# Altium PCB proto-rev0.PcbDoc (part 1 of 2)
Units mm, origin at the board's own origin, x right, y up, seen from the top; angles counter-clockwise.
Board outline 70 x 100 mm, 2 copper layers (Top Layer, Bottom Layer); 218 components, 156 nets, 639 pads, 222 vias.
Unrouted connection lines stored in the file: 43.
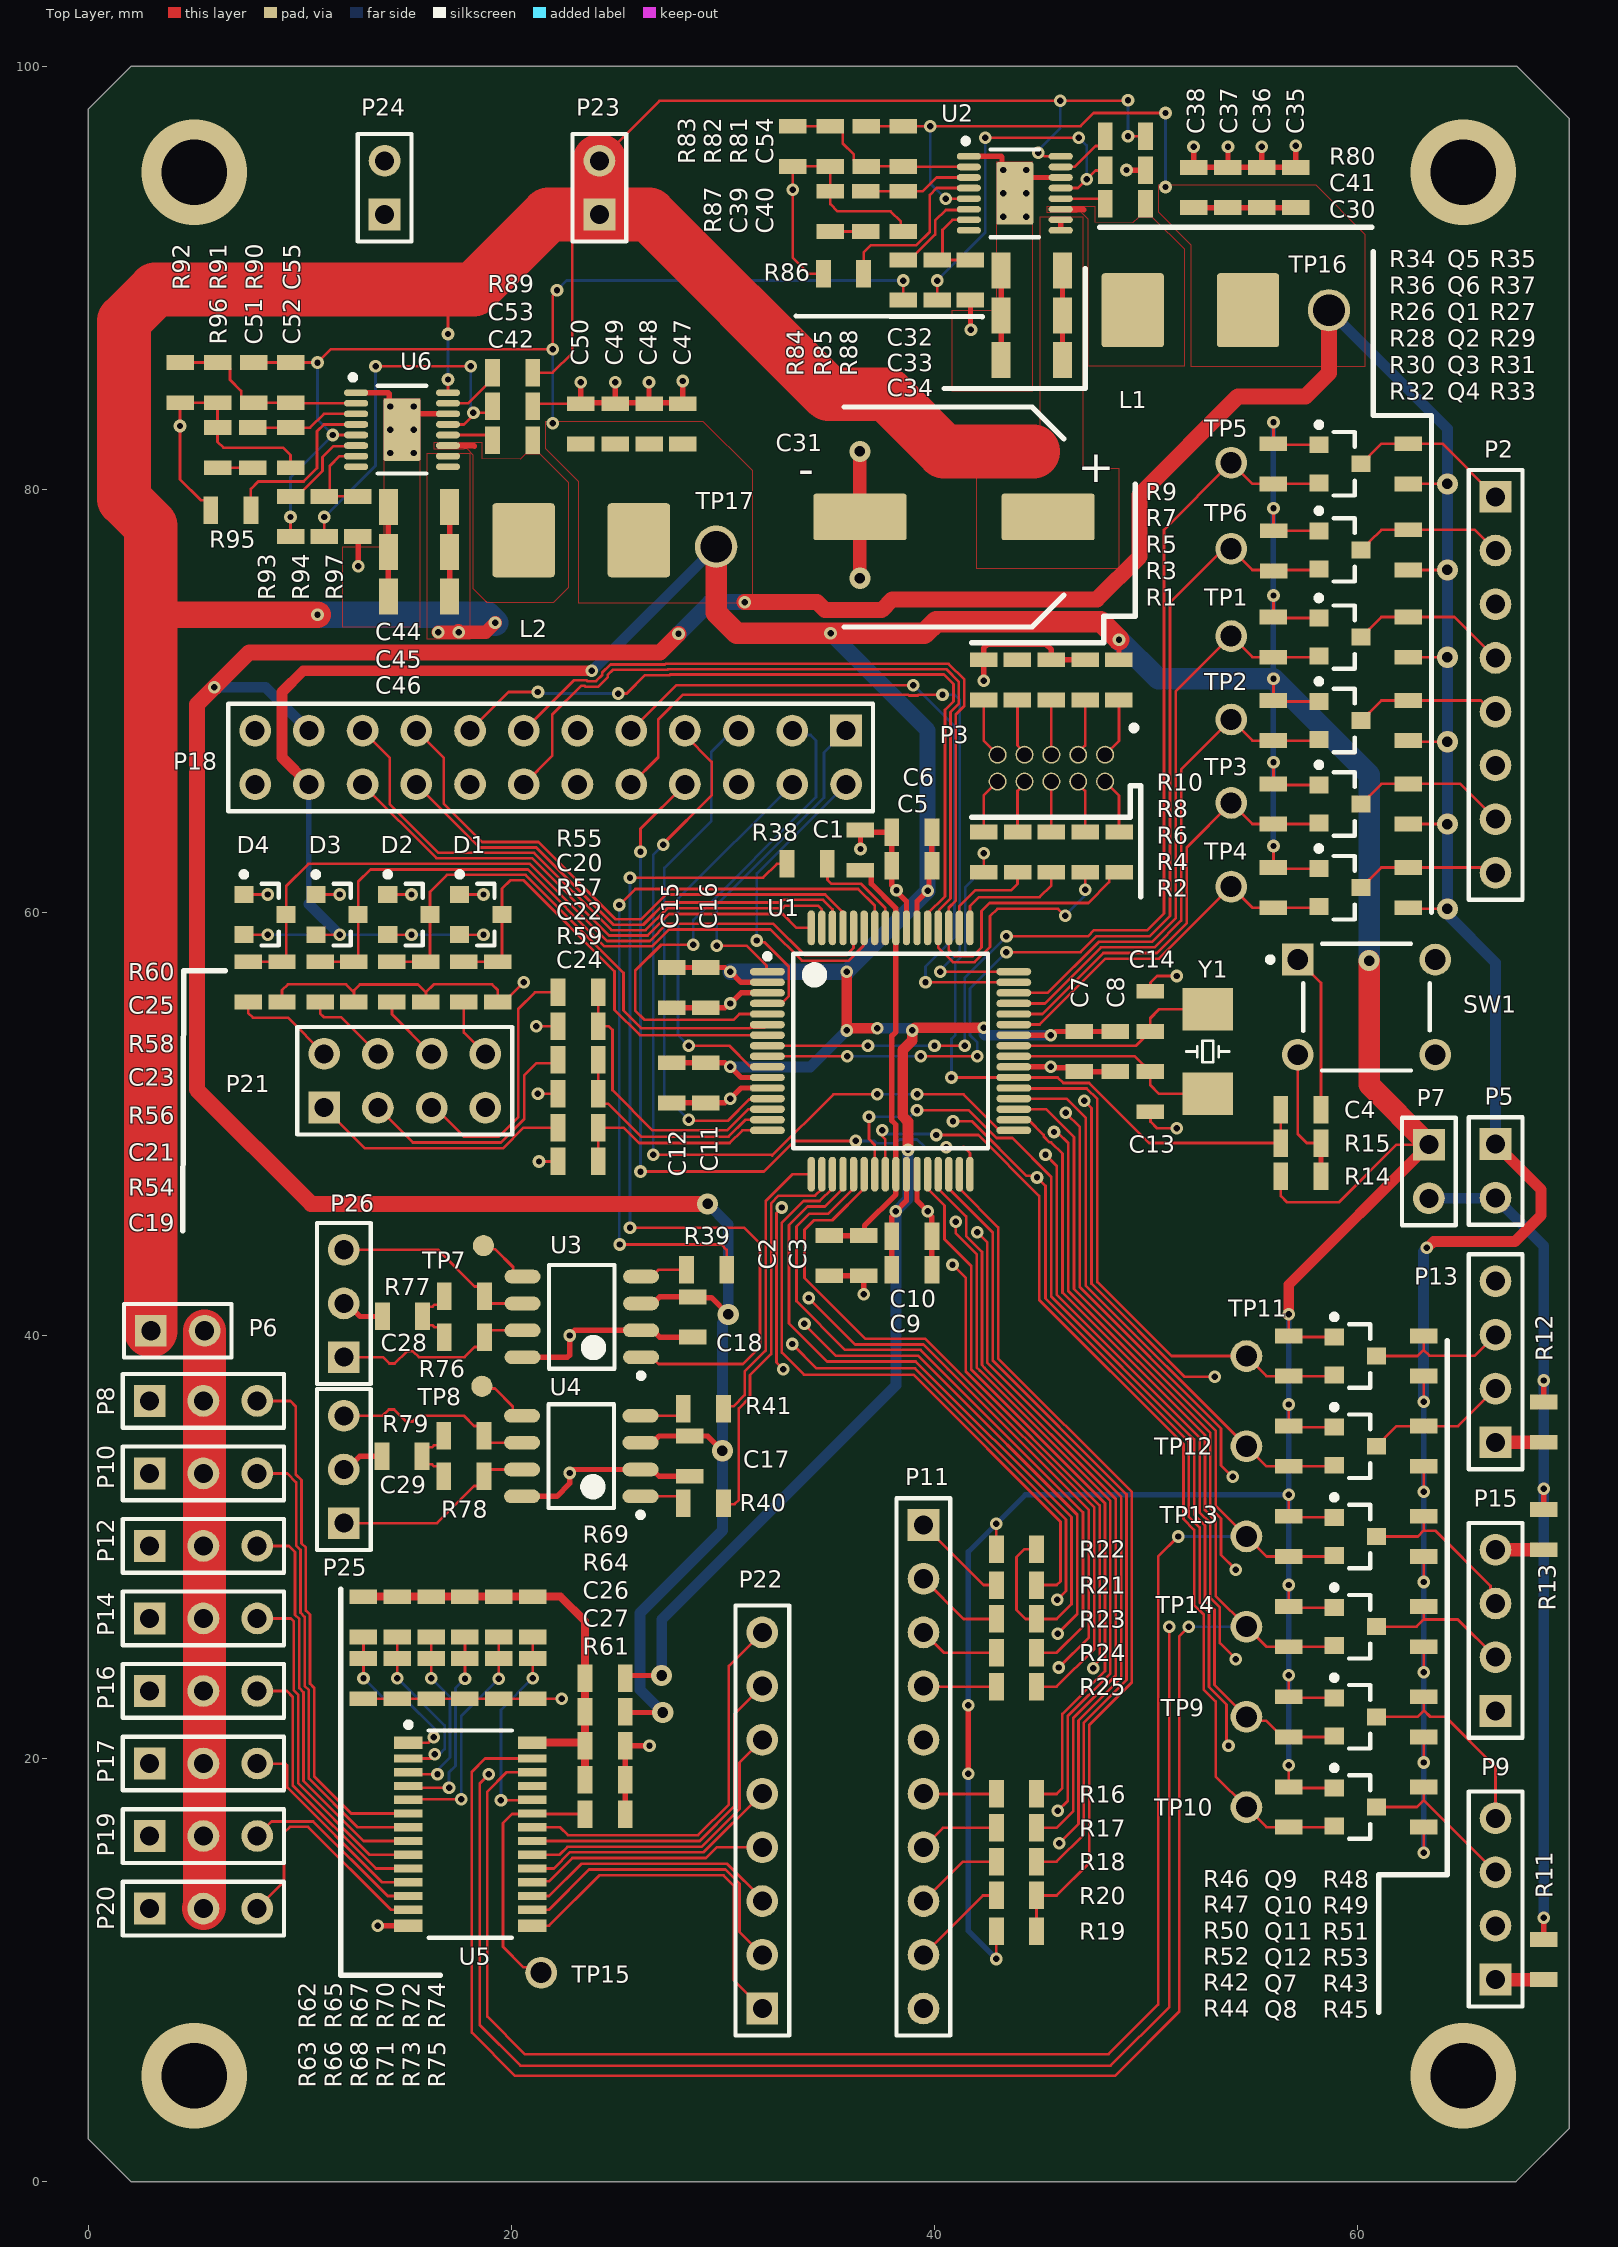
[diagram p0: Top Layer view]
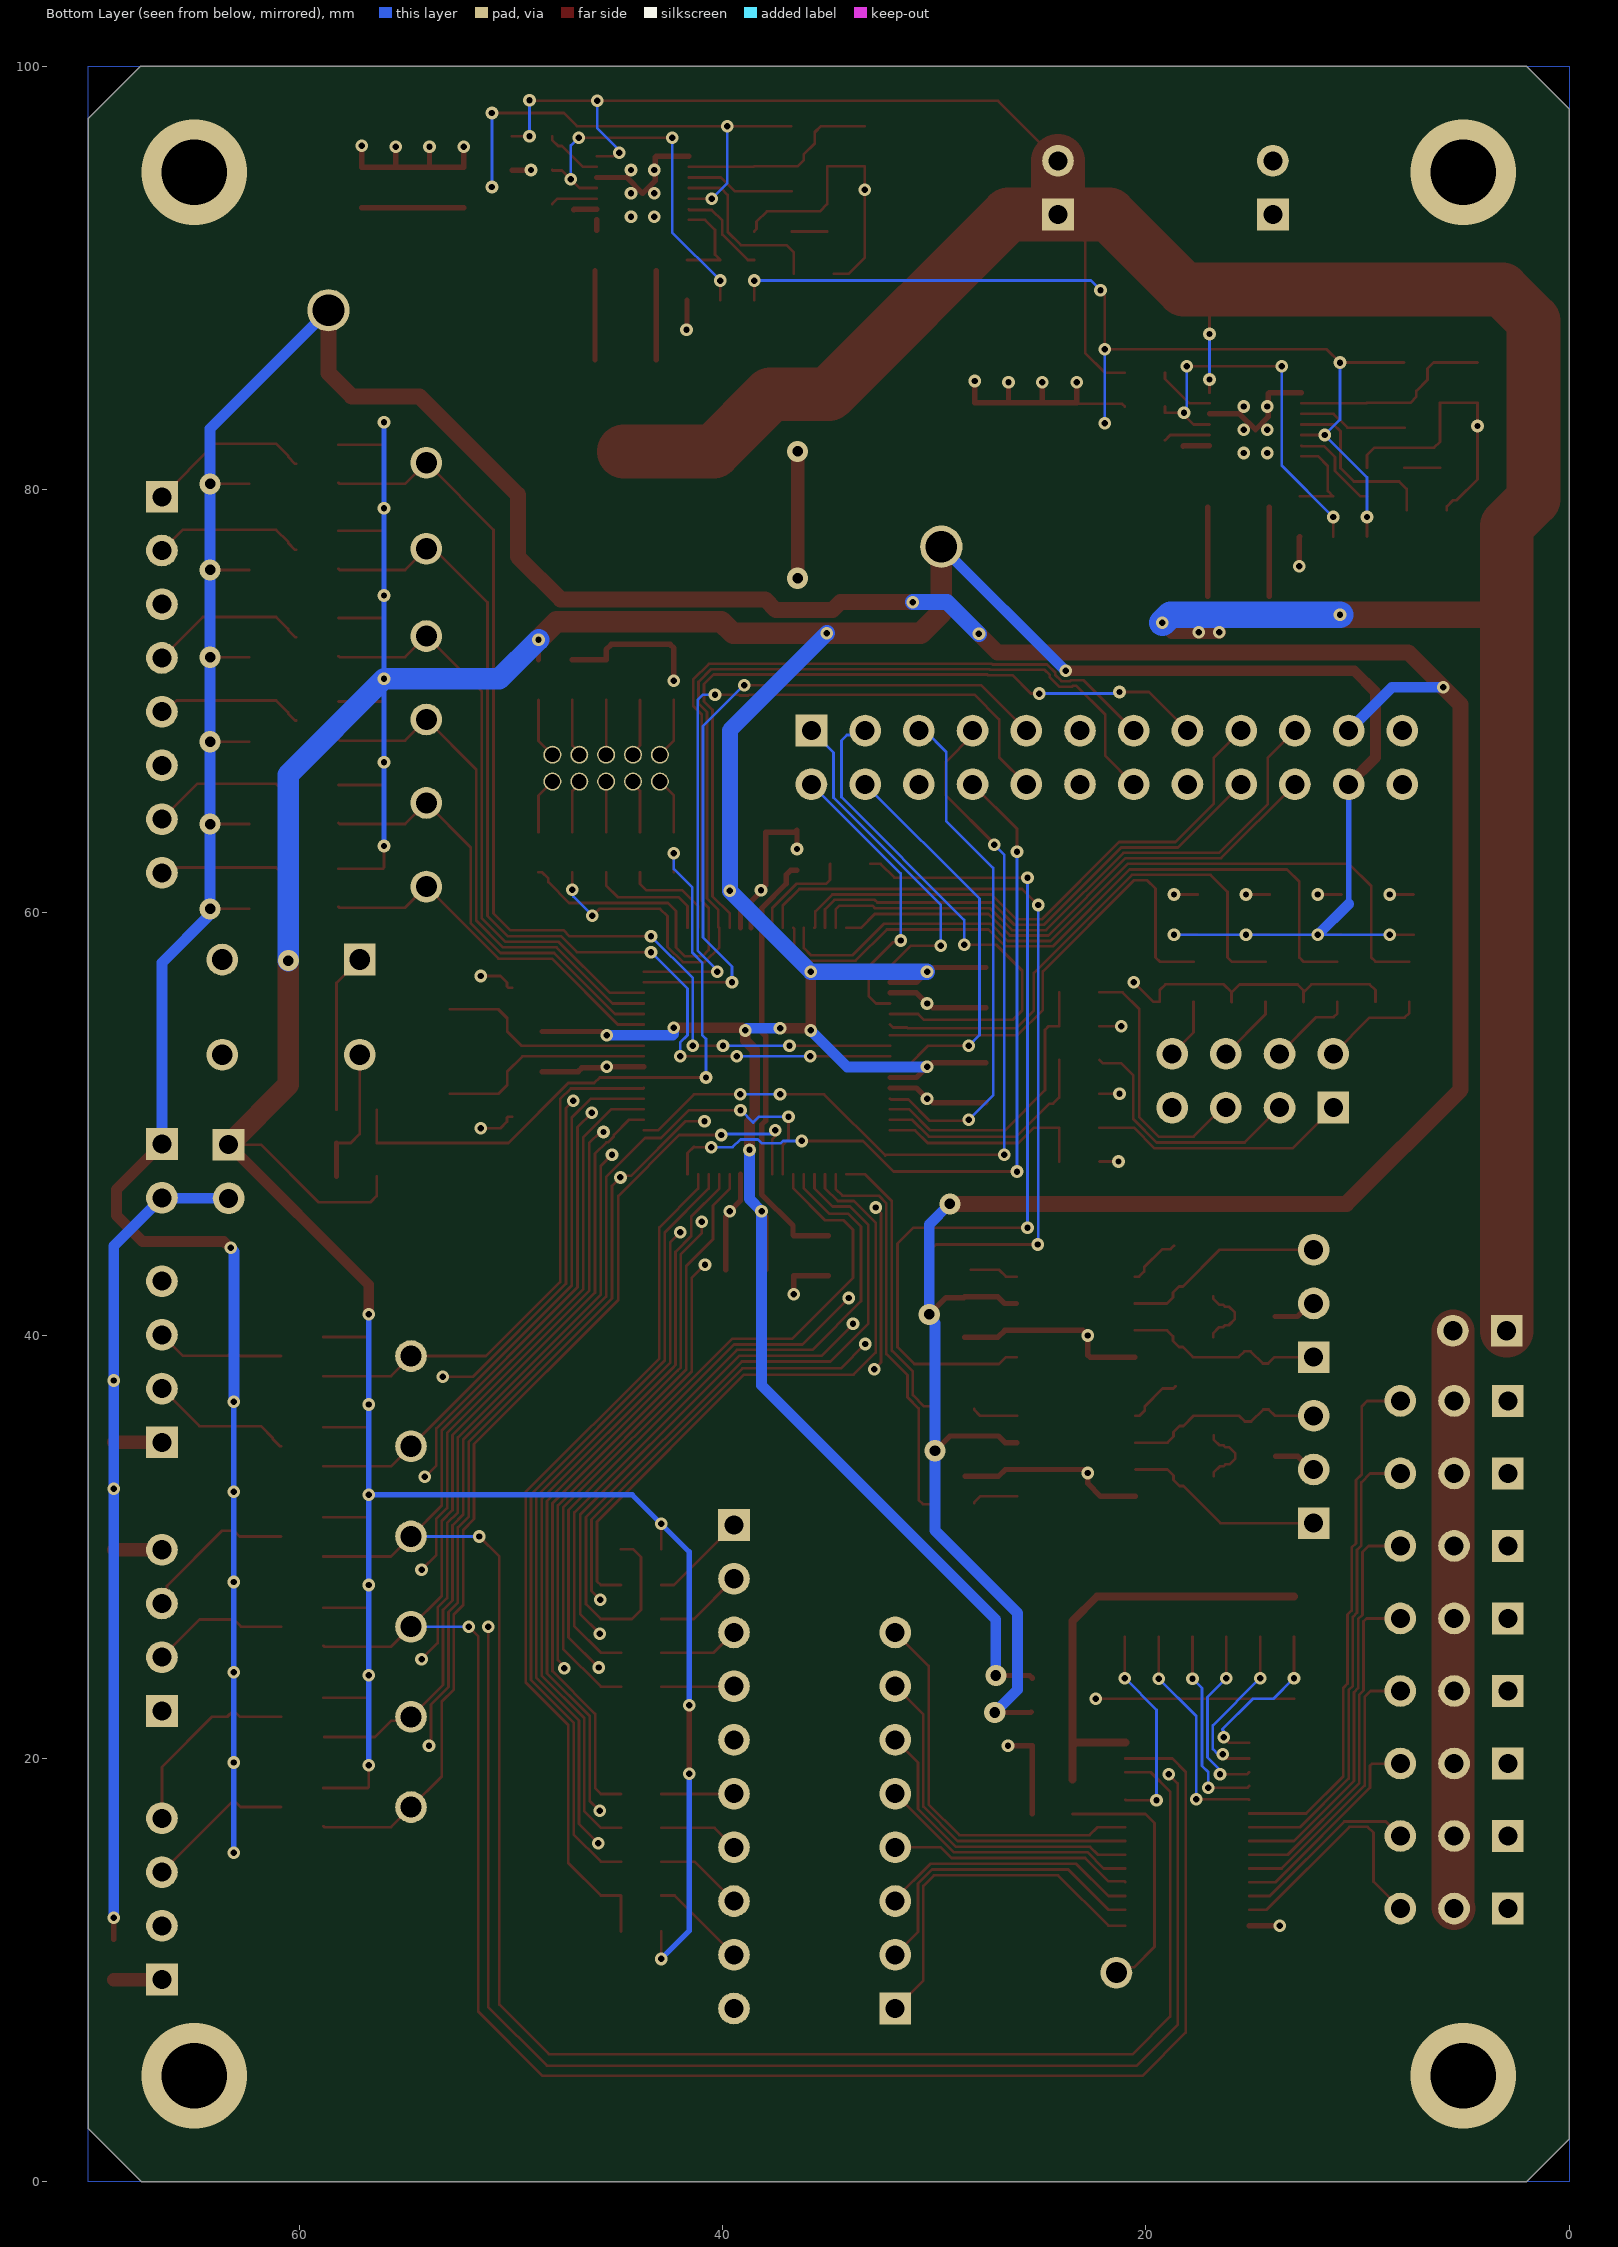
[diagram p1: Bottom Layer view, seen from below]
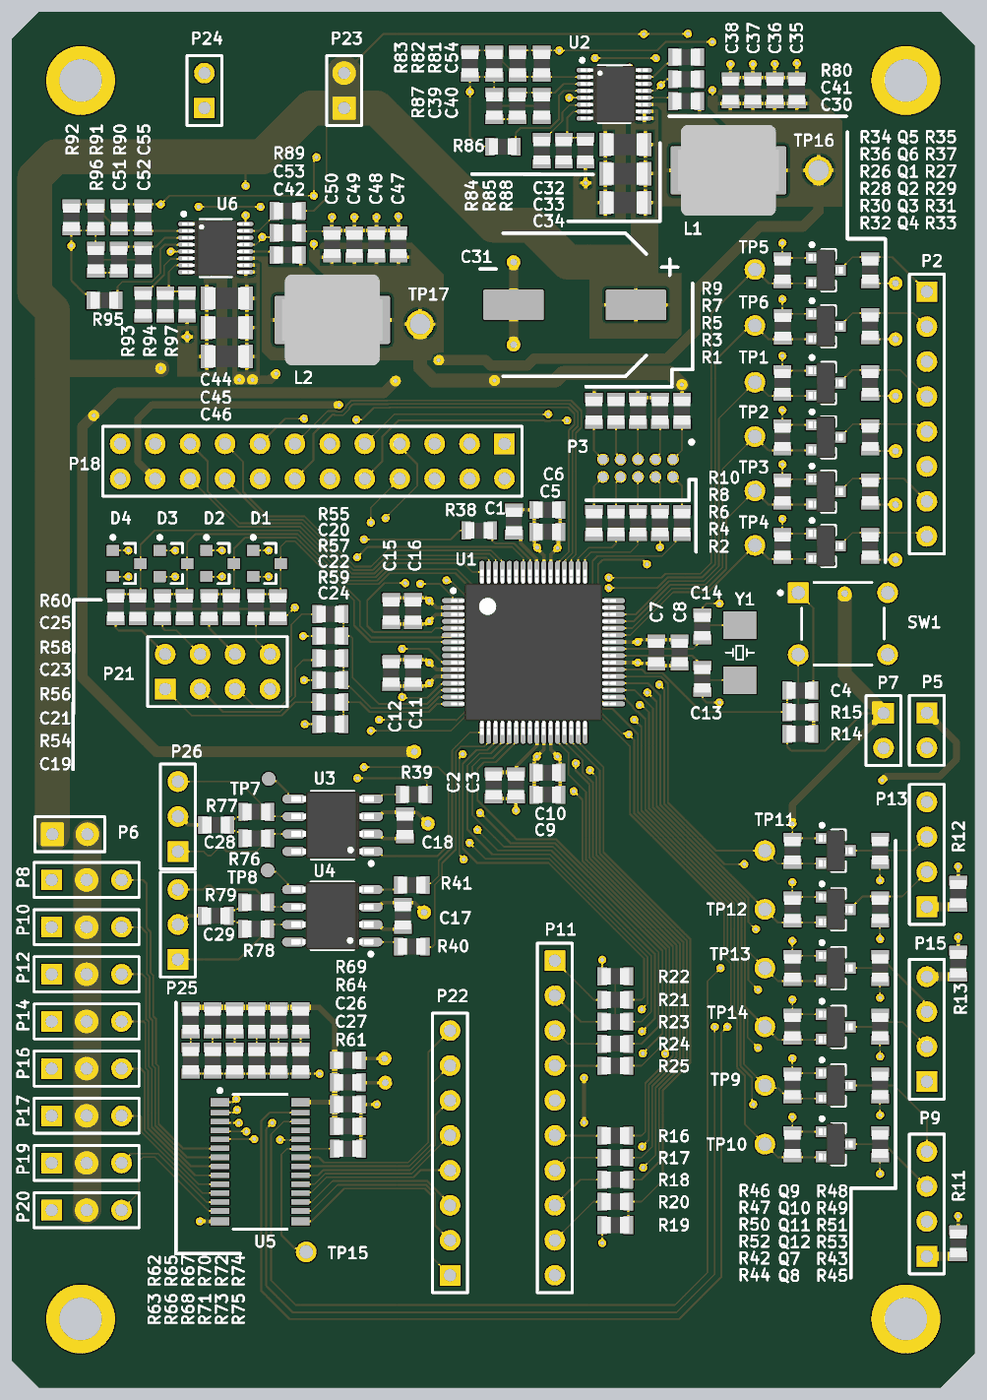
[diagram p3: 3D render of the assembled board from above, using the file's embedded part models]

## Layer stack, top to bottom
Top Solder: solder mask 0.0102, Solder Resist, Dk 3.5
Top Layer: signal copper 0.0356
Dielectric 1: dielectric 0.32, FR-4, Dk 4.8
Bottom Layer: signal copper 0.0356
Bottom Solder: solder mask 0.0102, Solder Resist, Dk 3.5

## Board outline
2,0 67.5,0 70,2.5 70,97.55 67.55,100 2,100 0,98 0,2

## Design rules (kind name [scope] priority, off if disabled: settings)
BoardOutlineClearance [All] p1: gap=0.254 ignorepadtopadclearanceinfootprint=FALSE
Clearance [All] p1: gap=0.127 ignorepadtopadclearanceinfootprint=FALSE
HoleSize [All] p1: absolutevalues=TRUE maxlimit=2.54 minlimit=0.3 maxpercent=80.000 minpercent=20.000
MinimumSolderMaskSliver [All] p1: minsoldermaskwidth=0
PolygonConnect [All] p1: connectstyle=Relief reliefconductorwidth=0.254 reliefentries=4 polygonreliefangle="90 Angle" airgapwidth=0.254
RoutingVias [All] p1: holewidth=0.5 width=1.27 viastyle="Through Hole" minholewidth=0.3 minwidth=0.6 maxholewidth=0.711 maxwidth=1.27
SolderMaskExpansion [All] p1: expansion=0.102
Width [All] p1: maxlimit=2.54 minlimit=0.127 preferedwidth=0.254 minimp=50.000000 maximp=50.000000 favimp=50.000000
28 further rules are at their usual default settings.

## Classes and differential pairs
component class "Secondary Power Supplies": C42 C44 C45 C46 C47 C48 C49 C50 C51 C52 C53 C55 L2 R89 R90 R91 R92 R93 R94 R95 R96 R97 TP17 U6
component class "Primary Power Supplies": C30 C31 C32 C33 C34 C35 C36 C37 C38 C39 C40 C41 C54 L1 R80 R81 R82 R83 R84 R85 R86 R87 R88 TP16 U2
net class PWM[15..0]: PWM0 PWM1 PWM2 PWM3 PWM4 PWM5 PWM6 PWM7 PWM8 PWM9 PWM10 PWM11 PWM12 PWM13 PWM14 PWM15
component class UART-Interface: Q1 Q2 Q3 Q4 Q5 Q6 R26 R27 R28 R29 R30 R31 R32 R33 R34 R35 R36 R37 TP1 TP2 TP3 TP4 TP5 TP6
component class PWM-Generator: C26 C27 R61 R62 R63 R64 R65 R66 R67 R68 R69 R70 R71 R72 R73 R74 R75 TP15 U5
component class "Power and Control": C1 C2 C3 C4 C5 C6 C7 C8 C9 C10 C11 C12 C13 C14 C15 C16 R14 R15 SW1 Y1
component class Pin-Filters: C19 C20 C21 C22 C23 C24 C25 D1 D2 D3 D4 R54 R55 R56 R57 R58 R59 R60
component class Peripherals: R16 R17 R18 R19 R20 R21 R22 R23 R24 R25 U1
component class "Input Power Filter": P23 P24
component class I2C-Interface: Q7 Q8 Q9 Q10 Q11 Q12 R42 R43 R44 R45 R46 R47 R48 R49 R50 R51 R52 R53 TP9 TP10 TP11 TP12 TP13 TP14
component class Connectors: C28 C29 P2 P3 P5 P6 P7 P8 P9 P10 P11 P12 P13 P14 P15 P16 P17 P18 P19 P20 P21 P22 P25 P26 R1 R2 R3 R4 R5 R6 R7 R8 R9 R10 R11 R12 R13 R76 R77 R78 R79
component class CAN-Interface: C17 C18 R38 R39 R40 R41 TP7 TP8 U3 U4

## Components (designator, comment, footprint, x,y, rotation, side; value= is the part's Value field where it differs from the comment)
C1 "C0805C104K8RACTU" FOOTPRINT-0805-GEN#1 35.85,64.25 r270 top value=100nF
C2 "C0805C105K8RACTU" FOOTPRINT-0805-GEN#1 35.675,42.475 r90 top value=1uF
C3 "C0805C225K8RACTU" FOOTPRINT-0805-GEN#1 36,45.075 r270 top value=2.2uF
C4 "C0805C104K8RACTU" FOOTPRINT-0805-GEN#2 58.625,50.025 r180 top value=100nF
C5 "C0805C225K8RACTU" FOOTPRINT-0805-GEN#1 40.225,62.85 r180 top value=2.2uF
C6 "C0805C225K8RACTU" FOOTPRINT-0805-GEN#1 40.225,64.45 r180 top value=2.2uF
C7 "C0805C225K8RACTU" FOOTPRINT-0805-GEN#1 46.2,54.725 r270 top value=2.2uF
C8 "C0805C225K8RACTU" FOOTPRINT-0805-GEN#1 47.9,54.725 r270 top value=2.2uF
C9 "C0805C225K8RACTU" FOOTPRINT-0805-GEN#1 37.625,42.45 r0 top value=2.2uF
C10 "C0805C225K8RACTU" FOOTPRINT-0805-GEN#1 37.625,44.05 r0 top value=2.2uF
C11 "C0805C225K8RACTU" FOOTPRINT-0805-GEN#1 28.525,53.25 r270 top value=2.2uF
C12 "C0805C225K8RACTU" FOOTPRINT-0805-GEN#1 26.925,53.25 r270 top value=2.2uF
C13 "C0805C100K5RAC7800" FOOTPRINT-0805-GEN#1 49.55,52.825 r270 top value=10pF
C14 "C0805C100K5RAC7800" FOOTPRINT-0805-GEN#1 50.85,54.025 r90 top value=10pF
C15 "C0805C104K8RACTU" FOOTPRINT-0805-GEN#1 28.225,55.15 r90 top value=100nF
C16 "C0805C105K8RACTU" FOOTPRINT-0805-GEN#1 29.825,55.15 r90 top value=1uF
C17 "C0805C105K8RACTU" FOOTPRINT-0805-GEN#1 29.075,33 r90 top value=1uF
C18 "C0805C105K8RACTU" FOOTPRINT-0805-GEN#1 29.225,39.575 r90 top value=1uF
C19 "Capacitor-Generic-0805" FOOTPRINT-0805-GEN#1 20,55.425 r90 top value=1nF
C20 "Capacitor-Generic-0805" FOOTPRINT-0805-GEN#1 21.853,53.978 r0 top value=1nF
C21 "Capacitor-Generic-0805" FOOTPRINT-0805-GEN#1 16.6,55.425 r90 top value=1nF
C22 "Capacitor-Generic-0805" FOOTPRINT-0805-GEN#1 21.853,50.778 r0 top value=1nF
C23 "Capacitor-Generic-0805" FOOTPRINT-0805-GEN#1 13.203,55.422 r90 top value=1nF
C24 "Capacitor-Generic-0805" FOOTPRINT-0805-GEN#1 21.853,47.578 r0 top value=1nF
C25 "Capacitor-Generic-0805" FOOTPRINT-0805-GEN#1 9.8,55.425 r90 top value=1nF
C26 "C0805C225K8RACTU" FOOTPRINT-0805-GEN#1 23.125,19.95 r0 top value=2.2uF
C27 "C0805C104K8RACTU" FOOTPRINT-0805-GEN#1 25.725,19.65 r180 top value=100nF
C28 "Capacitor-Generic-0805" FOOTPRINT-0805-GEN#1 16.15,41.55 r180 top value=100pF
C29 "Capacitor-Generic-0805" FOOTPRINT-0805-GEN#1 16.125,34.95 r180 top value=100pF
C30 "Capacitor-Generic-0805" FOOTPRINT-0805-GEN#1 50.325,94.152 r180 top value=0.1uF
C31 "Capacitor-Nippon-HHXC350ARA470MF80G" FOOTPRINT-NIPPON-JA0 40.925,78.7 r0 top value=100uF
C32 "C1206C475K5RACAUTO" FOOTPRINT-1206-GEN 42.7,89.552 r0 top value=4.7uF
C33 "C1206C475K5RACAUTO" FOOTPRINT-1206-GEN 42.7,87.427 r0 top value=4.7uF
C34 "C1206C475K5RACAUTO" FOOTPRINT-1206-GEN 42.7,85.327 r0 top value=4.7uF
C35 "C0805C225K8PAC" FOOTPRINT-0805-GEN#1 57.725,92.977 r90 top value=2.2uF
C36 "C0805C225K8PAC" FOOTPRINT-0805-GEN#1 56.125,92.977 r90 top value=2.2uF
C37 "C0805C106K8PAC" FOOTPRINT-0805-GEN#1 53.225,95.577 r270 top value=10uF
C38 "C0805C106K8PAC" FOOTPRINT-0805-GEN#1 51.6,95.577 r270 top value=10uF
C39 "C0805C100J3HACTU" FOOTPRINT-0805-GEN#1 37.4,91.852 r90 top value=10pF
C40 "C0805C519K5GACTU" FOOTPRINT-0805-GEN#1 39.175,91.852 r90 top value=5.1pF
C41 "C0805C475K8PAC" FOOTPRINT-0805-GEN#1 50.325,95.752 r180 top value=4.7uF
C42 "Capacitor-Generic-0805" FOOTPRINT-0805-GEN#1 21.353,82.974 r180 top value=0.1uF
C44 "C1206C475K5RACAUTO" FOOTPRINT-1206-GEN 13.728,78.374 r0 top value=4.7uF
C45 "C1206C475K5RACAUTO" FOOTPRINT-1206-GEN 13.728,76.249 r0 top value=4.7uF
C46 "C1206C475K5RACAUTO" FOOTPRINT-1206-GEN 13.728,74.149 r0 top value=4.7uF
C47 "C0805C225K8PAC" FOOTPRINT-0805-GEN#1 28.753,81.799 r90 top value=2.2uF
C48 "C0805C225K8PAC" FOOTPRINT-0805-GEN#1 27.153,81.799 r90 top value=2.2uF
C49 "C0805C106K8PAC" FOOTPRINT-0805-GEN#1 24.253,84.399 r270 top value=10uF
C50 "C0805C106K8PAC" FOOTPRINT-0805-GEN#1 22.628,84.399 r270 top value=10uF
C51 "C0805C100J3HACTU" FOOTPRINT-0805-GEN#1 8.428,80.674 r90 top value=10pF
C52 "C0805C519K5GACTU" FOOTPRINT-0805-GEN#1 10.203,80.674 r90 top value=5.1pF
C53 "C0805C475K8PAC" FOOTPRINT-0805-GEN#1 21.353,84.574 r180 top value=4.7uF
C54 "C0805C519K5GACTU" FOOTPRINT-0805-GEN#1 39.175,94.927 r90 top value=5.1pF
C55 "C0805C519K5GACTU" FOOTPRINT-0805-GEN#1 10.203,83.749 r90 top value=5.1pF
D1 "BAT54SLT1G" FOOTPRINT-ONSC-SOT23-1A2KA3K 18.55,59.9 r0 top
D2 "BAT54SLT1G" FOOTPRINT-ONSC-SOT23-1A2KA3K 15.15,59.9 r0 top
D3 "BAT54SLT1G" FOOTPRINT-ONSC-SOT23-1A2KA3K 11.753,59.897 r0 top
D4 "BAT54SLT1G" FOOTPRINT-ONSC-SOT23-1A2KA3K 8.35,59.9 r0 top
L1 "Inductor-Bourns-SRP7050TA-2R2M" FOOTPRINT-BOURNS-SRP7050TA 52.1,88.475 r180 top
L2 "Inductor-Bourns-SRP7050TA-2R2M" FOOTPRINT-BOURNS-SRP7050TA 23.3,77.6 r180 top
P2 "Header 8" HDR1X8 66.525,79.655 r270 top
P3 "IDC 10 pos" FOOTPRINT-GENERIC-10-HEADER-0MM5 45.525,66.825 r270 top
P5 "Header 2" HDR1X2 66.525,49.05 r270 top
P6 "Header 2" HDR1X2 2.95,40.225 r0 top
P7 "Header 2" HDR1X2 63.375,49.025 r270 top
P8 "Header 3" HDR1X3 2.895,36.907 r0 top
P9 "Header 4" HDR1X4 66.525,9.55 r90 top
P10 "Header 3" HDR1X3 2.895,33.479 r0 top
P11 "Header 10" HDR1X10 39.48,31.04 r270 top
P12 "Header 3" HDR1X3 2.895,30.05 r0 top
P13 "Header 4" HDR1X4 66.525,34.95 r90 top
P14 "Header 3" HDR1X3 2.895,26.621 r0 top
P15 "Header 4" HDR1X4 66.525,22.25 r90 top
P16 "Header 3" HDR1X3 2.895,23.193 r0 top
P17 "Header 3" HDR1X3 2.895,19.764 r0 top
P18 "Header 12X2" HDR2X12 35.82,68.6 r180 top
P19 "Header 3" HDR1X3 2.895,16.336 r0 top
P20 "Header 3" HDR1X3 2.895,12.907 r0 top
P21 "Header 4X2" HDR2X4 11.145,50.775 r0 top
P22 "Header 8" HDR1X8 31.86,8.18 r90 top
P23 "Header 2" HDR1X2 24.16,93 r90 top
P24 "Header 2" HDR1X2 14,93 r90 top
P25 "Header 3" HDR1X3 12.075,31.125 r90 top
P26 "Header 3" HDR1X3 12.075,38.975 r90 top
Q1 "BSS138Q-7-F" FOOTPRINT-DINC-SOT23-1G2S3D 59.175,73.02 r0 top
Q2 "BSS138Q-7-F" FOOTPRINT-DINC-SOT23-1G2S3D 59.175,69.075 r0 top
Q3 "BSS138Q-7-F" FOOTPRINT-DINC-SOT23-1G2S3D 59.175,65.13 r0 top
Q4 "BSS138Q-7-F" FOOTPRINT-DINC-SOT23-1G2S3D 59.175,61.175 r0 top
Q5 "BSS138Q-7-F" FOOTPRINT-DINC-SOT23-1G2S3D 59.175,81.215 r0 top
Q6 "BSS138Q-7-F" FOOTPRINT-DINC-SOT23-1G2S3D 59.175,77.145 r0 top
Q7 "BSS138Q-7-F" FOOTPRINT-DINC-SOT23-1G2S3D 59.9,21.97 r0 top
Q8 "BSS138Q-7-F" FOOTPRINT-DINC-SOT23-1G2S3D 59.9,17.705 r0 top
Q9 "BSS138Q-7-F" FOOTPRINT-DINC-SOT23-1G2S3D 59.9,39.03 r0 top
Q10 "BSS138Q-7-F" FOOTPRINT-DINC-SOT23-1G2S3D 59.9,34.765 r0 top
Q11 "BSS138Q-7-F" FOOTPRINT-DINC-SOT23-1G2S3D 59.9,30.5 r0 top
Q12 "BSS138Q-7-F" FOOTPRINT-DINC-SOT23-1G2S3D 59.9,26.235 r0 top
R1 "SMC" FOOTPRINT-0805-GEN#1 48.072,72.3 r270 top value=0
R2 "SMC" FOOTPRINT-0805-GEN#1 48.075,64.15 r270 top value=0
R3 "SMC" FOOTPRINT-0805-GEN#1 46.472,72.3 r270 top value=0
R4 "SMC" FOOTPRINT-0805-GEN#1 46.475,64.15 r270 top value=0
R5 "SMC" FOOTPRINT-0805-GEN#1 44.872,72.3 r270 top value=0
R6 "SMC" FOOTPRINT-0805-GEN#1 44.875,64.15 r270 top value=0
R7 "SMC" FOOTPRINT-0805-GEN#1 43.272,72.3 r270 top value=0
R8 "SMC" FOOTPRINT-0805-GEN#1 43.275,64.15 r270 top value=0
R9 "SMC" FOOTPRINT-0805-GEN#1 41.672,72.3 r270 top value=0
R10 "SMC" FOOTPRINT-0805-GEN#1 41.675,64.15 r270 top value=0
R11 "SMC" FOOTPRINT-0805-GEN#1 68.15,11.8 r270 top value=0
R12 "SMC" FOOTPRINT-0805-GEN#1 68.15,37.2 r270 top value=0
R13 "SMC" FOOTPRINT-0805-GEN#1 68.15,32.12 r270 top value=0
R14 "SMC" FOOTPRINT-0805-GEN#2 58.625,46.875 r180 top value=100k
R15 "SMC" FOOTPRINT-0805-GEN#2 58.625,48.45 r180 top value=3.3k
R16 "SMC" FOOTPRINT-0805-GEN#1 45.175,18.975 r180 top value=33.3
R17 "SMC" FOOTPRINT-0805-GEN#1 45.175,17.375 r180 top value=33.3
R18 "SMC" FOOTPRINT-0805-GEN#1 45.175,15.775 r180 top value=33.3
R19 "SMC" FOOTPRINT-0805-GEN#1 45.175,12.475 r180 top value=10k
R20 "SMC" FOOTPRINT-0805-GEN#1 45.175,14.175 r180 top value=0
R21 "SMC" FOOTPRINT-0805-GEN#1 45.175,28.85 r180 top value=33.3
R22 "SMC" FOOTPRINT-0805-GEN#1 45.175,30.55 r180 top value=10k
R23 "SMC" FOOTPRINT-0805-GEN#1 45.175,27.25 r180 top value=0
R24 "SMC" FOOTPRINT-0805-GEN#1 45.175,25.65 r180 top value=33.3
R25 "SMC" FOOTPRINT-0805-GEN#1 45.175,24.05 r180 top value=33.3
R26 "SMC" FOOTPRINT-0805-GEN#1 56.675,71.72 r90 top value=10k
R27 "SMC" FOOTPRINT-0805-GEN#1 63.05,71.72 r90 top value=10k
R28 "SMC" FOOTPRINT-0805-GEN#1 56.675,67.775 r90 top value=10k
R29 "SMC" FOOTPRINT-0805-GEN#1 63.05,67.775 r90 top value=10k
R30 "SMC" FOOTPRINT-0805-GEN#1 56.675,63.83 r90 top value=10k
R31 "SMC" FOOTPRINT-0805-GEN#1 63.05,63.83 r90 top value=10k
R32 "SMC" FOOTPRINT-0805-GEN#1 56.675,59.875 r90 top value=10k
R33 "SMC" FOOTPRINT-0805-GEN#1 63.05,59.875 r90 top value=10k
R34 "SMC" FOOTPRINT-0805-GEN#1 56.675,79.915 r90 top value=10k
R35 "SMC" FOOTPRINT-0805-GEN#1 63.05,79.915 r90 top value=10k
R36 "SMC" FOOTPRINT-0805-GEN#1 56.7,75.795 r90 top value=10k
R37 "SMC" FOOTPRINT-0805-GEN#1 63.05,75.845 r90 top value=10k
R38 "SMC" FOOTPRINT-0805-GEN#1 35.275,62.95 r180 top value=33.3
R39 "SMC" FOOTPRINT-0805-GEN#1 30.525,43.76 r180 top value=33.3
R40 "SMC" FOOTPRINT-0805-GEN#1 30.375,32.72 r180 top value=33.3
R41 "SMC" FOOTPRINT-0805-GEN#1 30.375,37.18 r180 top value=33.3
R42 "SMC" FOOTPRINT-0805-GEN#1 57.4,20.67 r90 top value=2.2k
R43 "SMC" FOOTPRINT-0805-GEN#1 63.775,20.67 r90 top value=2.2k
R44 "SMC" FOOTPRINT-0805-GEN#1 57.4,16.405 r90 top value=2.2k
R45 "SMC" FOOTPRINT-0805-GEN#1 63.775,16.405 r90 top value=2.2k
R46 "SMC" FOOTPRINT-0805-GEN#1 57.4,37.73 r90 top value=2.2k
R47 "SMC" FOOTPRINT-0805-GEN#1 57.4,33.465 r90 top value=2.2k
R48 "SMC" FOOTPRINT-0805-GEN#1 63.775,37.73 r90 top value=2.2k
R49 "SMC" FOOTPRINT-0805-GEN#1 63.775,33.465 r90 top value=2.2k
R50 "SMC" FOOTPRINT-0805-GEN#1 57.4,29.2 r90 top value=2.2k
R51 "SMC" FOOTPRINT-0805-GEN#1 63.775,29.2 r90 top value=2.2k
R52 "SMC" FOOTPRINT-0805-GEN#1 57.4,24.935 r90 top value=2.2k
R53 "SMC" FOOTPRINT-0805-GEN#1 63.775,24.935 r90 top value=2.2k
R54 "SMC" FOOTPRINT-0805-GEN#1 18.4,55.425 r90 top value=33.3
R55 "SMC" FOOTPRINT-0805-GEN#1 21.853,55.578 r0 top value=33.3
R56 "SMC" FOOTPRINT-0805-GEN#1 15,55.425 r90 top value=33.3
R57 "SMC" FOOTPRINT-0805-GEN#1 21.853,52.378 r0 top value=33.3
R58 "SMC" FOOTPRINT-0805-GEN#1 11.603,55.422 r90 top value=33.3
R59 "SMC" FOOTPRINT-0805-GEN#1 21.853,49.178 r0 top value=33.3
R60 "SMC" FOOTPRINT-0805-GEN#1 8.2,55.425 r90 top value=33.3
R61 "SMC" FOOTPRINT-0805-GEN#1 25.725,18.025 r180 top value=4.7k
R62 "SMC" FOOTPRINT-0805-GEN#2 12.35,25.4 r90 top value=4.7k
R63 "SMC" FOOTPRINT-0805-GEN#2 13.65,25.075 r270 top value=4.7k
R64 "SMC" FOOTPRINT-0805-GEN#1 23.125,21.55 r0 top value=0
R65 "SMC" FOOTPRINT-0805-GEN#2 13.95,25.4 r90 top value=4.7k
R66 "SMC" FOOTPRINT-0805-GEN#2 15.25,25.075 r270 top value=4.7k
R67 "SMC" FOOTPRINT-0805-GEN#2 15.55,25.4 r90 top value=4.7k
R68 "SMC" FOOTPRINT-0805-GEN#2 16.85,25.075 r270 top value=4.7k
R69 "SMC" FOOTPRINT-0805-GEN#1 25.725,24.45 r180 top value=0
R70 "SMC" FOOTPRINT-0805-GEN#2 17.15,25.4 r90 top value=4.7k
R71 "SMC" FOOTPRINT-0805-GEN#2 18.45,25.075 r270 top value=4.7k
R72 "SMC" FOOTPRINT-0805-GEN#2 18.75,25.4 r90 top value=4.7k
R73 "SMC" FOOTPRINT-0805-GEN#2 20.05,25.075 r270 top value=4.7k
R74 "SMC" FOOTPRINT-0805-GEN#1 21.65,25.4 r90 top value=4.7k
R75 "SMC" FOOTPRINT-0805-GEN#1 20.35,25.075 r270 top value=4.7k
R76 "SMC" FOOTPRINT-0805-GEN#1 16.475,39.275 r0 top value=60
R77 "SMC" FOOTPRINT-0805-GEN#1 19.075,42.5 r180 top value=60
R78 "SMC" FOOTPRINT-0805-GEN#1 16.45,32.7 r0 top value=60
R79 "SMC" FOOTPRINT-0805-GEN#1 19.05,35.92 r180 top value=60
R80 "SMC" FOOTPRINT-0805-GEN#1 50.325,97.352 r180 top value=0
R81 "SMC" FOOTPRINT-0805-GEN#2 36.125,94.927 r90 top value=619k
R82 "SMC" FOOTPRINT-0805-GEN#1 34.425,97.527 r270 top value=84.5k
R83 "Trim, 0 ohm" FOOTPRINT-0805-GEN#1 32.65,97.527 r270 top value=DNP
R84 "SMC" FOOTPRINT-0805-GEN#1 37.875,91.202 r270 top value=100k
R85 "SMC" FOOTPRINT-0805-GEN#1 39.475,91.202 r270 top value=100k
R86 "SMC" FOOTPRINT-0805-GEN#1 34.4,89.552 r0 top value=37.4k
R87 "SMC" FOOTPRINT-0805-GEN#1 34.425,94.452 r270 top value=154k
R88 "SMC" FOOTPRINT-0805-GEN#1 42.35,88.602 r90 top value=100k
R89 "SMC" FOOTPRINT-0805-GEN#1 21.353,86.174 r180 top value=0
R90 "SMC" FOOTPRINT-0805-GEN#1 8.453,83.749 r90 top value=619k
R91 "SMC" FOOTPRINT-0805-GEN#1 5.453,86.349 r270 top value=137k
R92 "Trim, 0 ohm" FOOTPRINT-0805-GEN#1 3.678,86.349 r270 top value=DNP
R93 "SMC" FOOTPRINT-0805-GEN#1 8.903,80.024 r270 top value=100k
R94 "SMC" FOOTPRINT-0805-GEN#1 10.503,80.024 r270 top value=100k
R95 "SMC" FOOTPRINT-0805-GEN#1 5.428,78.374 r0 top value=37.4k
R96 "SMC" FOOTPRINT-0805-GEN#1 5.453,83.274 r270 top value=133k
R97 "SMC" FOOTPRINT-0805-GEN#1 13.378,77.424 r90 top value=100k
SW1 "1825910-6" TECO-1825910-6_V 60.425,55.525 r0 top
TP1 "Misc-Generic-TP" FOOTPRINT-GENERIC-TP-VIA-1MM 54.025,73.07 r0 top
TP2 "Misc-Generic-TP" FOOTPRINT-GENERIC-TP-VIA-1MM 54.025,69.125 r90 top
TP3 "Misc-Generic-TP" FOOTPRINT-GENERIC-TP-VIA-1MM 54.025,65.18 r90 top
TP4 "Misc-Generic-TP" FOOTPRINT-GENERIC-TP-VIA-1MM 54.025,61.225 r90 top
TP5 "Misc-Generic-TP" FOOTPRINT-GENERIC-TP-VIA-1MM 54.025,81.265 r90 top
TP6 "Misc-Generic-TP" FOOTPRINT-GENERIC-TP-VIA-1MM 54.025,77.195 r90 top
TP7 "Misc-Generic-TP" FOOTPRINT-GENERIC-TP-SMD-1MM 18.675,44.25 r180 top
TP8 "Misc-Generic-TP" FOOTPRINT-GENERIC-TP-SMD-1MM 18.6,37.6 r180 top
TP9 "Misc-Generic-TP" FOOTPRINT-GENERIC-TP-VIA-1MM 54.75,21.97 r0 top
TP10 "Misc-Generic-TP" FOOTPRINT-GENERIC-TP-VIA-1MM 54.75,17.705 r90 top
TP11 "Misc-Generic-TP" FOOTPRINT-GENERIC-TP-VIA-1MM 54.75,39.03 r90 top
TP12 "Misc-Generic-TP" FOOTPRINT-GENERIC-TP-VIA-1MM 54.75,34.765 r90 top
TP13 "Misc-Generic-TP" FOOTPRINT-GENERIC-TP-VIA-1MM 54.75,30.5 r90 top
TP14 "Misc-Generic-TP" FOOTPRINT-GENERIC-TP-VIA-1MM 54.75,26.235 r90 top
TP15 "Misc-Generic-TP" FOOTPRINT-GENERIC-TP-VIA-1MM 21.4,9.875 r90 top
TP16 "Misc-Generic-TP" FOOTPRINT-GENERIC-TP-VIA-1MM5 58.65,88.475 r90 top
TP17 "Misc-Generic-TP" FOOTPRINT-GENERIC-TP-VIA-1MM5 29.678,77.298 r90 top
U1 "IC-TI-TM4C123FH6PM" FOOTPRINT-TI-TM4C123-64-LQFP 37.925,53.45 r0 top
U2 "IC-LTC-LTC3646-1EMSE#PBF" FOOTPRINT-LTC-LTC3646 43.796,94.002 r0 top
U3 "MCP2551" FOOTPRINT-SOIC-8PIN 23.325,40.88 r180 top
U4 "MCP2551" FOOTPRINT-SOIC-8PIN 23.3,34.3 r180 top
U5 "PCA9685PW/Q900,118" FOOTPRINT-NXP-PCA9685 18.05,16.425 r0 top
U6 "IC-LTC-LTC3646-1EMSE#PBF" FOOTPRINT-LTC-LTC3646 14.824,82.824 r0 top
Y1 "NX5032GA-16.000000MHZ-LN-CD-1" FOOTPRINT-NDK-NX5032GA 52.925,53.425 r90 top

## Footprints (in the part's own frame and the unit in brackets; to place one, negate y for a bottom-side part, rotate by r counter-clockwise, add the part's x,y. Pads: shape width x height; smd on the part's side, far side on the other; paste and mask are expansions set on the pad)
FOOTPRINT-0805-GEN#1 [mm] "1/8 Watt"
  rect 0.7x1.3 smd: 1(0.35,0.65) 2(2.25,0.65)
  body extent 0.3,0.05 2.3,1.25, height 0.71
FOOTPRINT-0805-GEN#2 [mm] "1/8 Watt"
  rect 0.7x1.3 smd: 1(0.35,-0.65) 2(2.25,-0.65)
  body extent 0.3,-1.25 2.3,-0.05, height 0.71
FOOTPRINT-1206-GEN [mm] "1/4 Watt"
  rect 0.9x1.7 smd: 1(0.45,0.8) 2(3.35,0.8)
  body extent 0.3,0 3.5,1.6, height 0.71
FOOTPRINT-BOURNS-SRP7050TA [mm] "FIXED IND SMD"
  rrect10% 2.95x3.5 smd: 1(2.725,0) 2(-2.725,0)
  body extent -3.65,-3.3 3.65,3.3, height 4.9
FOOTPRINT-DINC-SOT23-1G2S3D [mm] "SOT23, 3-Leads, Body 2.90x2.40mm, Pitch 0.90mm, IPC Low Density"
  rect 0.9x0.8 smd: 1(-1,0.9) 2(-1,-0.9) 3(1,0)
  silkscreen extent -1.12,-1.5 0.7,1.97, body extent -1.25,-1.5 1.25,1.5, height 1
FOOTPRINT-GENERIC-10-HEADER-0MM5 [mm]
  round 0.85 hole 0.7: 1(-0.635,2.54) 2(0.635,2.54) 3(-0.635,1.27) 4(0.635,1.27) 5(-0.635,0) 6(0.635,0) 7(-0.635,-1.27) 8(0.635,-1.27) 9(-0.635,-2.54) 10(0.635,-2.54)
  silkscreen extent -1.91,3.89 -1.89,3.91
FOOTPRINT-GENERIC-TP-SMD-1MM [mm]
  round 1 smd: 1(0,0)
FOOTPRINT-GENERIC-TP-VIA-1MM [mm]
  round 1.5 / inner round 1.524 / far side round 1.5 hole 1: 1(0,0)
FOOTPRINT-GENERIC-TP-VIA-1MM5 [mm]
  round 2 hole 1.5: 1(0,0)
FOOTPRINT-LTC-LTC3646 [mil] "TSSOP, 16-Leads, Body 4.04x3.00mm, Pitch 0.50mm, Thermal Pad 2.95x1.75mm, IPC Low Density"
  oval 45x12.5 smd: 1(-85.5,68.9) 2(-85.5,49.21) 3(-85.5,29.53) 4(-85.5,9.84) 5(-85.5,-9.84) 6(-85.5,-29.53) 7(-85.5,-49.21) 8(-85.5,-68.9) 9(85.5,-68.9) 10(85.5,-49.21) 11(85.5,-29.53) 12(85.5,-9.84) 13(85.5,9.84) 14(85.5,29.53) 15(85.5,49.21) 16(85.5,68.9)
  rrect10% 68.9x116.14 smd: 17(0,0)
  silkscreen extent -96,-82 45,102, body extent -96,-81 96,81, height 43
FOOTPRINT-NDK-NX5032GA [mm] "CRYSTAL 16.0000MHZ 8PF SMD"
  rect 2x2.4 smd: 1(-2,0) 2(2,0)
  silkscreen extent -0.51,-1.02 0.51,1.02, body extent -2.54,-1.65 2.54,1.65, height 1.3
FOOTPRINT-NIPPON-JA0 [mm]
  rrect10% 4.4x2.2 smd: 1(4.45,0) 2(-4.45,0)
  silkscreen extent -5.2,-5.2 5.2,5.2
FOOTPRINT-NXP-PCA9685 [mm] "SOP, 28-Leads, Body 9.7x4.4mm, Pitch 0.65mm, NXP Recommended"
  rect 1.35x0.6 smd: 1(-2.925,4.325) 14(-2.925,-4.325) 15(2.925,-4.325) 28(2.925,4.325)
  rect 1.35x0.4 smd: 2(-2.925,3.575) 3(-2.925,2.925) 4(-2.925,2.275) 5(-2.925,1.625) 6(-2.925,0.975) 7(-2.925,0.325) 8(-2.925,-0.325) 9(-2.925,-0.975) 10(-2.925,-1.625) 11(-2.925,-2.275) 12(-2.925,-2.925) 13(-2.925,-3.575) 16(2.925,-3.575) 17(2.925,-2.925) 18(2.925,-2.275) 19(2.925,-1.625) 20(2.925,-0.975) 21(2.925,-0.325) 22(2.925,0.325) 23(2.925,0.975) 24(2.925,1.625) 25(2.925,2.275) 26(2.925,2.925) 27(2.925,3.575)
  silkscreen extent -3.05,-4.9 1.96,5.3, body extent -2.2,-4.85 2.2,4.85, height 1.1
FOOTPRINT-ONSC-SOT23-1A2KA3K [mm] "SOT23, 3-Leads, Body 2.92x1.3mm, Pitch 0.95mm"
  rect 0.9x0.8 smd: 1(-1,0.95) 2(-1,-0.95) 3(1,0)
  silkscreen extent -1.12,-1.46 0.65,2.02, body extent -0.65,-1.46 0.65,1.46, height 1.11
FOOTPRINT-SOIC-8PIN [mm] "SOIC, 8-Leads, Body 4.90x3.90mm, Pitch 1.27mm, IPC Low Density"
  oval 1.7x0.65 smd: 1(-2.8,1.905) 2(-2.8,0.635) 3(-2.8,-0.635) 4(-2.8,-1.905) 5(2.8,-1.905) 6(2.8,-0.635) 7(2.8,0.635) 8(2.8,1.905)
  silkscreen extent -2.93,-2.45 1.55,2.9, body extent -3,-2.45 3,2.45, height 1.75
FOOTPRINT-TI-TM4C123-64-LQFP [mm] "TSQFP, 64-Leads, Body 10.00x10.00mm, Pitch 0.50mm, IPC Low Density"
  oval 1.65x0.35 smd: 1(-5.825,3.75) 2(-5.825,3.25) 3(-5.825,2.75) 4(-5.825,2.25) 5(-5.825,1.75) 6(-5.825,1.25) 7(-5.825,0.75) 8(-5.825,0.25) 9(-5.825,-0.25) 10(-5.825,-0.75) 11(-5.825,-1.25) 12(-5.825,-1.75) 13(-5.825,-2.25) 14(-5.825,-2.75) 15(-5.825,-3.25) 16(-5.825,-3.75) 33(5.825,-3.75) 34(5.825,-3.25) 35(5.825,-2.75) 36(5.825,-2.25) 37(5.825,-1.75) 38(5.825,-1.25) 39(5.825,-0.75) 40(5.825,-0.25) 41(5.825,0.25) 42(5.825,0.75) 43(5.825,1.25) 44(5.825,1.75) 45(5.825,2.25) 46(5.825,2.75) 47(5.825,3.25) 48(5.825,3.75)
  oval 0.35x1.65 smd: 17(-3.75,-5.825) 18(-3.25,-5.825) 19(-2.75,-5.825) 20(-2.25,-5.825) 21(-1.75,-5.825) 22(-1.25,-5.825) 23(-0.75,-5.825) 24(-0.25,-5.825) 25(0.25,-5.825) 26(0.75,-5.825) 27(1.25,-5.825) 28(1.75,-5.825) 29(2.25,-5.825) 30(2.75,-5.825) 31(3.25,-5.825) 32(3.75,-5.825) 49(3.75,5.825) 50(3.25,5.825) 51(2.75,5.825) 52(2.25,5.825) 53(1.75,5.825) 54(1.25,5.825) 55(0.75,5.825) 56(0.25,5.825) 57(-0.25,5.825) 58(-0.75,5.825) 59(-1.25,5.825) 60(-1.75,5.825) 61(-2.25,5.825) 62(-2.75,5.825) 63(-3.25,5.825) 64(-3.75,5.825)
  silkscreen extent -5.95,-4.6 4.6,4.6, body extent -6,-6 6,6, height 1.6
HDR1X2 [mm] "Connector; Header; 2 Position"
  rect 1.5x1.5 hole 0.9: 1(0,0)
  round 1.5 hole 0.9: 2(2.54,0)
  silkscreen extent -1.27,-1.27 3.81,1.27
HDR1X3 [mm] "Connector; Header; 3 Position"
  rect 1.5x1.5 hole 0.9: 1(0,0)
  round 1.5 hole 0.9: 2(2.54,0) 3(5.08,0)
  silkscreen extent -1.27,-1.27 6.35,1.27
HDR1X4 [mm] "Connector; Header; 4 Position"
  rect 1.5x1.5 hole 0.9: 1(0,0)
  round 1.5 hole 0.9: 2(2.54,0) 3(5.08,0) 4(7.62,0)
  silkscreen extent -1.27,-1.27 8.89,1.27
HDR1X8 [mm] "Connector; Header; 8 Position"
  rect 1.5x1.5 hole 0.9: 1(0,0)
  round 1.5 hole 0.9: 2(2.54,0) 3(5.08,0) 4(7.62,0) 5(10.16,0) 6(12.7,0) 7(15.24,0) 8(17.78,0)
  silkscreen extent -1.27,-1.27 19.05,1.27
HDR1X10 [mm] "Connector; Header; 10 Position"
  rect 1.5x1.5 hole 0.9: 1(0,0)
  round 1.5 hole 0.9: 2(2.54,0) 3(5.08,0) 4(7.62,0) 5(10.16,0) 6(12.7,0) 7(15.24,0) 8(17.78,0) 9(20.32,0) 10(22.86,0)
  silkscreen extent -1.27,-1.27 24.13,1.27
HDR2X4 [mm] "Connector; Header; 4x2 Position"
  rect 1.5x1.5 hole 0.9: 1(0,0)
  round 1.5 hole 0.9: 2(0,2.54) 3(2.54,0) 4(2.54,2.54) 5(5.08,0) 6(5.08,2.54) 7(7.62,0) 8(7.62,2.54)
  silkscreen extent -1.27,-1.27 8.89,3.81
HDR2X12 [mm] "Connector; Header; 12x2 Position"
  rect 1.5x1.5 hole 0.9: 1(0,0)
  round 1.5 hole 0.9: 2(0,2.54) 3(2.54,0) 4(2.54,2.54) 5(5.08,0) 6(5.08,2.54) 7(7.62,0) 8(7.62,2.54) 9(10.16,0) 10(10.16,2.54) 11(12.7,0) 12(12.7,2.54) 13(15.24,0) 14(15.24,2.54) 15(17.78,0) 16(17.78,2.54) 17(20.32,0) 18(20.32,2.54) 19(22.86,0) 20(22.86,2.54) 21(25.4,0) 22(25.4,2.54) 23(27.94,0) 24(27.94,2.54)
  silkscreen extent -1.27,-1.27 29.21,3.81
TECO-1825910-6_V [mm] "Switch, 4-Leads, Body 5.99x5.99mm"
  rect 1.5x1.5 hole 0.99: 1(-3.25,2.25)
  round 1.5 hole 0.99: 2(3.25,2.25) 3(-3.25,-2.25) 4(3.25,-2.25)
  silkscreen extent -4.67,-2.99 2.99,3, body extent -3,-2.99 2.99,3, height 5

## Part data
C1 C2 C3 C4 C5 C6 C7 C8 C9 C10 C11 C12 C13 C14 C15 C16 C17 C18 C26 C27 C40 C52 C54 C55: library part Capacitor-Generic-0805, "Capacitor", LatestRevisionDate=17-Jul-2002, LatestRevisionNote="Re-released for DXP Platform.", PackageDescription="Radial Cap, Thru-Hole; 2 Leads; 0.3 in Pin Spacing", PackageReference=RAD-0.3, Published=8-Jun-2000, Publisher="Altium Limited"
C19 C20 C21 C22 C23 C24 C25 C28 C29 C30 C42: "Capacitor", LatestRevisionDate=17-Jul-2002, LatestRevisionNote="Re-released for DXP Platform.", PackageDescription="Radial Cap, Thru-Hole; 2 Leads; 0.3 in Pin Spacing", PackageReference=RAD-0.3, Published=8-Jun-2000, Publisher="Altium Limited"
C31: "CAP ALUM POLY 100UF 20% 50V SMD"
C32 C33 C34 C44 C45 C46: library part Capacitor-Generic-1206, "CAP CER 1206 4.7UF 50V X7R 10%", LatestRevisionDate=17-Jul-2002, LatestRevisionNote="Re-released for DXP Platform.", PackageDescription="Radial Cap, Thru-Hole; 2 Leads; 0.3 in Pin Spacing", PackageReference=RAD-0.3, Published=8-Jun-2000, Publisher="Altium Limited"
C35 C36 C47 C48: library part Capacitor-Generic-0805, "CAP CER 2.2UF 10V X5R 0805", LatestRevisionDate=17-Jul-2002, LatestRevisionNote="Re-released for DXP Platform.", PackageDescription="Radial Cap, Thru-Hole; 2 Leads; 0.3 in Pin Spacing", PackageReference=RAD-0.3, Published=8-Jun-2000, Publisher="Altium Limited"
C37 C38 C49 C50: library part Capacitor-Generic-0805, "CAP CER 10UF 10V X5R 0805", LatestRevisionDate=17-Jul-2002, LatestRevisionNote="Re-released for DXP Platform.", PackageDescription="Radial Cap, Thru-Hole; 2 Leads; 0.3 in Pin Spacing", PackageReference=RAD-0.3, Published=8-Jun-2000, Publisher="Altium Limited"
C39 C51: library part Capacitor-Generic-0805, "CAP CER 0805 10PF 25V ULTRA STAB", LatestRevisionDate=17-Jul-2002, LatestRevisionNote="Re-released for DXP Platform.", PackageDescription="Radial Cap, Thru-Hole; 2 Leads; 0.3 in Pin Spacing", PackageReference=RAD-0.3, Published=8-Jun-2000, Publisher="Altium Limited"
C41 C53: library part Capacitor-Generic-0805, "CAP CER 4.7UF 10V X5R 0805", LatestRevisionDate=17-Jul-2002, LatestRevisionNote="Re-released for DXP Platform.", PackageDescription="Radial Cap, Thru-Hole; 2 Leads; 0.3 in Pin Spacing", PackageReference=RAD-0.3, Published=8-Jun-2000, Publisher="Altium Limited"
D1 D2 D3 D4: library part Diode-ONSC-BAT54S, "Dual Series Schottky Barrier Diodes, 3-Pin SOT-23, Pb-Free, Tape and Reel", Manufacturer="On Semiconductor", ComponentLink1Description="Manufacturer URL", ComponentLink1URL=http://www.onsemi.com/, ComponentLink2Description=Datasheet, ComponentLink2URL=http://www.onsemi.cn/pub_link/Collateral/BAT54SLT1-D.PDF, ComponentLink3Description="Package Specification", ComponentLink3URL=http://www.onsemi.cn/pub_link/Collateral/318-08.PDF, Configuration=Dual, DatasheetVersion="Rev. 15", IFSM Max (A)=0.6, Mounting Technology="Surface Mount", PackageDescription="3-Pin Small Outline Transistor, Body 2.92 x 1.3 mm, Pitch 0.95 mm", PackageReference=SOT-23-3-318-08, PackageVersion="Rev. AP, 11/2009", Packing="Tape and Reel", PartNumber=BAT54SLT1G, RoHS=TRUE, trr Max (ns)=5
L1 L2: "FIXED IND 2.2UH 10A 12 MOHM SMD"
P2 P22: "Header, 8-Pin", LatestRevisionDate=17-Jul-2002, LatestRevisionNote="Re-released for DXP Platform.", Publisher="Altium Limited"
P3: library part Connector-Generic-Header-10-0mm5
P5 P6 P7 P23 P24: "Header, 2-Pin", LatestRevisionDate=17-Jul-2002, LatestRevisionNote="Re-released for DXP Platform.", Publisher="Altium Limited"
P8 P10 P12 P14 P16 P17 P19 P20 P25 P26: "Header, 3-Pin", LatestRevisionDate=17-Jul-2002, LatestRevisionNote="Re-released for DXP Platform.", Publisher="Altium Limited"
P9 P13 P15: "Header, 4-Pin", LatestRevisionDate=17-Jul-2002, LatestRevisionNote="Re-released for DXP Platform.", Publisher="Altium Limited"
P11: "Header, 10-Pin", LatestRevisionDate=17-Jul-2002, LatestRevisionNote="Re-released for DXP Platform.", Publisher="Altium Limited"
P18: "Header, 12-Pin, Dual row", LatestRevisionDate=17-Jul-2002, LatestRevisionNote="Re-released for DXP Platform.", Publisher="Altium Limited"
P21: "Header, 4-Pin, Dual row", LatestRevisionDate=17-Jul-2002, LatestRevisionNote="Re-released for DXP Platform.", Publisher="Altium Limited"
Q1 Q2 Q3 Q4 Q5 Q6 Q7 Q8 Q9 Q10 Q11 Q12: library part Transistor-DiodesInc-BSS138-1G2S3D, "N-Channel Logic Level Enhancement Mode Field Effect Transistor", ComponentLink1Description="Manufacturer Link", ComponentLink1URL=http://www.irf.com/, DatasheetVersion=PD-9.814, LatestRevisionDate=17-Jul-2002, LatestRevisionNote="Re-released for DXP Platform.", Note="Pin 2 is electrically connected to pin 4.", PackageDescription="TO, Thru-Hole, Vertical, Heatsink Mounted; 3 In-Line Leads; Pitch 2.54 mm", PackageReference=TO-220AB, PackageVersion=Feb-1997, Published=8-Jun-2000, Publisher="Altium Limited"
R1 R2 R3 R4 R5 R6 R7 R8 R9 R10 R11 R12 R13 R14 R15 R16 R17 R18 R19 R20 R21 R22 R23 R24 R25 R26 R27 R28 R29 R30 R31 R32 R33 R34 R35 R36 R37 R38 R39 R40 R41 R42 R43 R44 R45 R46 R47 R48 R49 R50 R51 R52 R53 R54 R55 R56 R57 R58 R59 R60 R61 R62 R63 R64 R65 R66 R67 R68 R69 R70 R71 R72 R73 R74 R75 R76 R77 R78 R79 R80 R81 R82 R83 R84 R85 R86 R87 R88 R89 R90 R91 R92 R93 R94 R95 R96 R97: library part Resistor-Generic-0805-2012, "1/8 Watt Surface Mount Resistor"
SW1: library part CMP-1684-00021-1, "Tact Switch, SPST-NO, 0.05 A, -35 to 85 degC, 4-Pin THD, RoHS, Bulk", Actuator Color=Black, Contact Rating @ Voltage=0.05A@24VDC, Dielectric Strength=500VAC, Manufacturer="TE Connectivity", Maximum AC Voltage Rating=N/A, Maximum Contact Resistance=100mOhm, Maximum DC Voltage Rating=24V, Minimum Insulation Resistance=100MOhm, Operating Temperature=-35to85C, Package Description="4-Pin Through Hole Device, Body 5.99 x 5.99 mm, Pitch 6.5 mm", Package Reference=THD, Actuator Length=1.4mm, Actuator Material=PolybutyleneTerephthalate, Actuator Style=RoundButton, Base Material=N/A, Body Orientation=Straight, Bushing Type=Unthreaded, Contact Material=CopperAlloy, Contact Plating=Silver, Datasheet URL=http://www.te.com/commerce/DocumentDelivery/DDEController?Action=showdoc&DocId=Customer+Drawing%7F1825910%7FC9%7Fpdf%7FEnglish%7FENG_CD_1825910_C9.pdf%7F1825910-6, Datasheet Version="Rev. C9", Dimension=5.99x5mm, Electrical Life=100000Cycles, Family=1825910, Function=MomentaryContact, Housing Material=N/A, Illumination=N/R, Manufacturer URL=http://www.te.com, Mechanical Life=100000Cycles, Mounting=ThroughHole, Packaging=N/A, Part No=1825910-6, Pole Throw Configuration=SPST, Product Weight=N/A, RoHS=Yes, Seal Description=N/A, Seal Location=N/A, Switch Configuration=OFF(ON), Terminal Type=PCPins, Thread Size=N/R
U2 U6: "1 A Synchronous Step-Down Converter, 16-pin SOP (MSE-16-EDP), -40 to 85 degC, Pb-Free", Frequency Adjust Range="200kHz - 3MHz", Manufacturer="Linear Technology", PartNumber=LTC3646EMSE#PBF, ComponentLink1Description="Manufacturer URL", ComponentLink1URL=http://www.linear.com/, ComponentLink2Description=Datasheet, ComponentLink2URL=http://cds.linear.com/docs/en/datasheet/36461fa.pdf, ComponentLink3Description="Package Specification", ComponentLink3URL=http://cds.linear.com/docs/en/packaging/05081667_F_MSE16.pdf, Mounting Technology="Surface Mount", Number of Outputs=1, PackageDescription="16-Pin Plastic MSOP, Exposed Die Pad, Body 4.039 x 3 mm, Pitch 0.5 mm", PackageReference=MSE-16, PackageVersion="Rev. F, 05/2013", RoHS=TRUE
U3 U4: library part IC-MCP-MCP2551
U5: library part IC-NXP-PCA9685, "16-Channel, 12-Bit PWM Fm+ I2C-Bus LED Controller, 2.3 to 5.5 V, -40 to 85 degC, 28-Pin TSSOP (SOT361-1), RoHS, Tape and Reel", Frequency="25000000 Hz", PartNumber=PCA9685, Supply Current Max="10 mA", Supply Voltage Max="5.5 V", Supply Voltage Min="2.3 V", Temperature Max="85 degC", Temperature Min="-40 degC", Code_JEDEC=MO-153, ComponentLink1Description="Manufacturer URL", ComponentLink1URL=http://www.nxp.com/, ComponentLink2Description=Datasheet, ComponentLink2URL=http://www.nxp.com/documents/data_sheet/PCA9685.pdf, ComponentLink3Description="Package Specification", ComponentLink3URL=http://www.nxp.com/documents/outline_drawing/sot361-1_po.pdf, DatasheetVersion="Rev. 4", Mounting Technology="Surface Mount", PackageDescription="28-Pin Small Outline Package, Body 9.7 x 4.4 mm, Pitch 0.65 mm", PackageVersion=02/2003, Packing="Tape and Reel", RoHS=TRUE
Y1: library part Crystal-NDK-NX5032GA-16MHz, NameShort=NX5032GA-16MHz

## Via types
v1: diameter 0.6, hole 0.3, Top Layer to Bottom Layer, 204 vias
v2: diameter 1, hole 0.5, Top Layer to Bottom Layer, 14 vias
v3: diameter 5, hole 3.1, Top Layer to Bottom Layer, 4 vias

## Nets (pads, with @x,y where several pads share a name; then routed paths per layer and width w, separated by ;. In a path a pad name is that pad's centre, name@x,y a point inside that pad or via, vN(x,y) a via of type N, cw(c..) or ccw(c..) an arc to the next point about the centre after c; other vN are vias at no path point)
AIN0-1: C21.2 D2.3 R56.2 U1.6 | length 25.4
  Top Layer w0.127: R56.2@14.35,57.675 C21.2@15.95,57.675 16.15,57.875 D2.3@16.15,59.9 16.15,60.975 16.954,61.779 20.67,61.779 25.3,57.149 25.3,55.375 26.15,54.525 31.258,54.525 31.299,54.565 31.965,54.565 U1.6@32.1,54.7
AIN1-1: C19.2 D1.3 R54.2 U1.7 | length 21.9
  Top Layer w0.127: R54.2@17.75,57.675 C19.2@19.35,57.675 19.55,57.875 D1.3@19.55,59.9 19.55,61.125 19.95,61.525 20.565,61.525 24.875,57.215 24.875,55.4 26.075,54.2 U1.7@32.1,54.2
AIN8-1: C25.2 D4.3 R60.2 U1.60 | length 36.1
  Top Layer w0.127: R60.2@7.55,57.675 C25.2@9.15,57.675 9.35,57.875 D4.3@9.35,59.9 9.35,61.25 10.4,62.3 20.867,62.3 24.513,58.654 26.541,58.654 27.362,59.475 32.375,59.475 33.871,57.979 35.829,57.979 36.175,58.325 U1.60@36.175,59.275
AIN9-1: C23.2 D3.3 R58.2 U1.59 | length 33.2
  Top Layer w0.127: R58.2@10.953,57.672 C23.2@12.553,57.672 12.753,57.872 D3.3@12.753,59.897 12.753,61.453 13.333,62.033 20.775,62.033 24.408,58.4 26.646,58.4 27.446,59.2 32.25,59.2 33.725,57.725 35.95,57.725 36.632,58.407 36.632,59.232 U1.59@36.675,59.275
CAN0RX: R39.1 U1.58 | length 35.9
  Top Layer w0.127: v1(25.101,60.353) 25.856,61.108 36.392,61.108 37.175,60.325 U1.58@37.175,59.275 ; v1(25.125,44.3) 29.925,44.3 30.175,44.05 R39.1@30.175,43.11
  Bottom Layer w0.127: v1(25.101,60.353) 25.101,44.324 v1(25.125,44.3)
CAN0TX: R38.1 U1.57 | length 5
  Top Layer w0.127: R38.1@34.925,62.3 34.941,62.284 34.941,61.534 35.113,61.362 36.513,61.362 37.675,60.2 U1.57@37.675,59.275
CAN1RX: R41.1 U1.17 | length 13.5
  Top Layer w0.127: R41.1@30.025,36.53 30.147,36.652 30.491,36.652 31.025,37.185 31.025,38.3 31.996,39.271 32.021,39.296 32.021,46.355 33.291,47.625 U1.17@34.175,47.625
CAN1TX: R40.1 U1.18 | length 18.8
  Top Layer w0.127: R40.1@30.025,32.025 30.55,32.025 30.75,32.225 30.75,36.551 31.279,37.08 31.279,37.291 31.279,38.129 32.275,39.125 32.275,46.25 32.635,46.61 34.36,46.61 34.675,46.925 U1.18@34.675,47.625
GND: C1.1 C2.1 C3.2 C4.1 C5.2 C6.2 C7.2 C8.2 C9.2 C10.2 C11.2 C12.2 C13.2 C14.2 C15.1 C16.1 C17.1 C18.1 C19.1 C20.1 C21.1 C22.1 C23.1 C24.1 C25.1 C26.2 C27.1 C28.2 C29.2 C31.2 C32.1 C33.1 C34.1 C35.2 C36.2 C37.1 C38.1 C40.1 C41.1 C44.1 C45.1 C46.1 C47.2 C48.2 C49.1 C50.1 C52.1 C53.1 D1.1 D2.1 D3.1 D4.1 P2.3 P2.6 P8.1 P9.2 P10.1 P11.5 P11.10 P12.1 P13.4 P14.1 P15.1 P16.1 P17.1 P18.6 P18.11 P18.12 P18.16 P18.23 P18.24 P19.1 P20.1 P21.7 P24.1 P24.2 P25.2 P26.2 R3.1 R5.1 R9.1 R61.1 R63.2 R66.2 R68.2 R71.2 R73.2 R75.2 R82.2 R83.2 R86.1 R87.1 R88.1 R91.2 R92.2 R95.1 R96.1 R97.1 SW1.1 U1.3 U1.12 U1.27 U1.39 U1.55 U2.1 U2.14 U2.17 U3.2 U3.8 U4.2 U4.8 U5.14 U6.1 U6.14 U6.17 | length 537.8
  Top Layer w0.127: R95.1@5.778,79.024 5.778,79.204 5.492,79.49 5.312,79.49 4.328,80.474 v1(4.328,82.999) R92.2@4.328,84.099 R91.2@6.103,84.099 R96.1@6.103,82.924 6.103,82.247 6.375,81.975 9.204,81.975 9.553,81.625 C52.1@9.553,81.024 ; D4.1@7.35,60.85 v1(8.475,60.85) ; C25.1@9.15,55.775 9.15,56.325 9.425,56.6 12.175,56.6 12.537,56.238 12.537,55.788 C23.1@12.553,55.772 12.553,56.322 12.828,56.597 15.578,56.597 15.94,56.235 15.94,55.785 C21.1@15.95,55.775 ; D3.1@10.753,60.847 v1(11.878,60.847) ; R63.2@13,22.825 R66.2@14.6,22.825 R68.2@16.2,22.825 R71.2@17.8,22.825 R73.2@19.4,22.825 R75.2@21,22.825 v1(22.375,22.825) ; D2.1@14.15,60.85 v1(15.275,60.85) ; C21.1@15.947,55.772 C21.1@15.95,55.775 ; C21.1@15.956,55.769 C21.1@15.95,55.775 ; D1.1@17.55,60.85 v1(18.675,60.85) ; v1(18.925,19.25) 18.5,18.825 18.5,7.409 20.43,5.479 48.329,5.479 51.105,8.255 v1(51.105,26.23) ; v1(20.575,56.7) 19.937,56.062 19.65,55.775 C19.1@19.35,55.775 19.35,56.325 19.075,56.6 16.325,56.6 15.963,56.238 15.963,55.788 C21.1@15.95,55.775 ; C53.1@21.003,83.924 21.128,84.049 C50.1@23.278,84.049 ; v1(21.175,54.628) C20.1@22.203,54.628 ; v1(21.25,51.428) C22.1@22.203,51.428 ; v1(21.3,48.228) C24.1@22.203,48.228 ; v1(32.775,46.05) 32.775,46.035 32.529,45.789 32.529,38.721 v1(32.85,38.4) ; v1(33.275,39.6) 34.425,38.45 39.075,38.45 46.22,31.305 46.22,27.92 v1(45.8,27.5) ; v1(33.85,40.55) 33.825,40.55 35.325,39.05 39.225,39.05 40.093,38.182 46.75,31.525 46.75,26.825 v1(45.825,25.9) ; v1(34.05,41.775) 36.246,39.579 39.474,39.579 40.643,38.41 47.3,31.752 47.3,25.725 v1(45.875,24.3) ; R86.1@34.75,90.202 34.048,90.202 33.3,90.95 v1(33.3,94.177) R83.2@33.3,95.277 R82.2@35.075,95.277 R87.1@35.075,94.102 35.075,93.5 35.423,93.152 37.928,93.152 38.412,92.668 38.412,92.315 C40.1@38.525,92.202 ; v1(40.85,43.35) 41.484,42.716 41.484,38.287 47.808,31.963 47.808,24.66 47.5,24.352 v1(47.5,24.275) ; v1(40.875,50.125) 41.784,50.125 44.359,47.55 44.775,47.55 v1(44.85,47.475) 45.246,47.079 45.246,41.755 52.026,34.975 52.026,31.428 52.534,30.92 52.534,27.373 52.982,26.925 52.982,23.379 53.81,22.551 53.81,20.69 v1(53.9,20.6) ; v1(41,45.375) 41,44.841 41.992,43.849 41.992,38.498 42.15,38.34 48.317,32.173 48.317,24.026 46.3,22.009 46.3,18 v1(45.825,17.525) ; v1(42.025,44.875) 42.5,44.4 42.5,38.708 48.825,32.384 48.825,23.816 46.808,21.799 46.808,16.908 v1(45.9,16) ; v1(45.25,48.55) 45.775,48.025 45.775,41.944 52.534,35.185 52.534,31.638 53.042,31.13 53.042,27.584 53.49,27.136 53.49,25.46 v1(54.25,24.7) ; v1(45.65,49.625) 45.8,49.625 46.325,49.1 46.325,42.112 53.042,35.395 53.042,31.849 53.55,31.341 53.55,29.625 v1(54.25,28.925) ; v1(46.2,50.525) 46.875,49.85 46.875,42.281 53.55,35.606 53.55,33.85 54.075,33.325 v1(54.1,33.325) ; v1(47.075,51.1) 47.425,50.75 47.425,42.449 51.824,38.05 v1(53.25,38.05) ; C13.2@49.975,50.35 50.155,50.35 50.216,50.288 50.216,50.109 50.525,49.8 v1(51.45,49.8) ; C14.2@49.975,56.447 50.154,56.447 50.216,56.508 50.216,56.688 50.525,56.997 v1(51.45,56.997) ; SW1.1@57.175,57.775 58.275,56.675 C4.1@58.275,50.675
  Top Layer w0.254: P25.2@12.075,33.665 12.194,33.665 12.829,34.3 C29.2@13.875,34.3 ; P26.2@12.075,41.515 12.232,41.515 12.847,40.9 C28.2@13.9,40.9 ; U6.1@12.653,84.574 14.179,84.574 14.222,84.532 14.222,83.427 U6.17@14.824,82.824 U6.17@14.824,82.824 15.572,83.574 U6.14@16.996,83.574 ; R97.1@12.728,77.774 12.75,77.752 v1(12.75,76.375) ; v1(13.675,12.1) U5.14@15.125,12.1 ; C46.1@14.178,74.949 C45.1@14.178,77.049 C44.1@14.178,79.174 ; U4.8@20.5,32.395 22.145,32.395 22.75,33 v1(22.75,33.5) 22.915,33.665 U4.2@26.1,33.665 26.652,33.665 26.972,33.345 C17.1@28.55,33.345 ; U3.8@20.525,38.975 22.65,38.975 22.75,39.075 v1(22.75,40) 22.995,40.245 U3.2@26.125,40.245 26.677,40.245 26.997,39.925 C18.1@28.575,39.925 ; v1(23.278,85.077) 23.278,84.102 C49.1@24.903,84.102 ; v1(24.903,85.077) C49.1@24.903,84.102 ; R61.1@25.375,17.375 C27.1@25.375,19 C26.2@25.375,20.6 v1(26.525,20.6) ; v1(26.503,85.077) C48.2@26.503,84.102 ; C12.2@27.575,51 C11.2@29.175,51 30.083,51 30.283,51.2 v1(30.35,51.2) 30.85,51.7 U1.12@32.1,51.7 ; C15.1@27.575,55.5 C16.1@29.175,55.5 30.083,55.5 30.283,55.7 v1(30.35,55.7) 30.85,56.2 U1.3@32.1,56.2 ; C47.2@28.103,84.102 C48.2@26.503,84.102 ; C47.2@28.103,84.155 v1(28.103,85.13) ; C2.1@35.025,42.825 C3.2@36.65,42.825 v1(36.65,41.95) ; v1(36.5,63) C1.1@36.5,63.9 36.6,63.8 C6.2@37.975,63.8 C5.2@37.975,62.2 37.975,61.292 38.204,61.062 v1(38.204,61.055) 38.204,60.996 38.675,60.525 U1.55@38.675,59.275 ; U1.27@39.175,47.625 39.175,46.375 v1(39.675,45.875) 39.675,45.808 39.875,45.608 C10.2@39.875,44.7 C9.2@39.875,43.1 ; U2.1@41.625,95.752 43.151,95.752 43.194,95.709 43.194,94.604 U2.17@43.796,94.002 43.796,94.004 44.544,94.752 U2.14@45.968,94.752 ; R88.1@41.7,88.952 41.7,87.574 v1(41.722,87.552) ; v1(42.322,70.95) R9.1@42.322,71.95 42.322,72.5 42.497,72.675 45.275,72.675 45.522,72.428 R5.1@45.522,71.95 R3.1@47.122,71.95 ; C34.1@43.15,86.127 C33.1@43.15,88.227 C32.1@43.15,90.352 ; U1.39@43.75,52.7 v1(45.5,52.7) 45.547,52.653 46.672,52.653 C7.2@46.85,52.475 C8.2@48.55,52.475 ; v1(49.075,95.102) C41.1@49.975,95.102 ; v1(52.25,96.202) C38.1@52.25,95.227 C37.1@53.875,95.227 ; v1(53.875,96.202) C37.1@53.875,95.227 ; v1(55.475,96.202) C36.2@55.475,95.227 ; C35.2@57.075,95.227 C36.2@55.475,95.227 ; C35.2@57.075,95.28 v1(57.075,96.255) ; C49.1@24.903,84.102 C48.2@26.503,84.102 ; C37.1@53.875,95.227 C36.2@55.475,95.227
  Top Layer w0.635: v2(36.475,75.8) C31.2@36.475,78.7 v2(36.475,81.8)
  other v1: 14.274,81.724 15.374,81.724 14.274,82.824 15.374,82.824 14.274,83.924 15.374,83.924 43.246,92.902 44.346,92.902 43.246,94.002 44.346,94.002 43.246,95.102 44.346,95.102
  other v3: 5,5 65,5 5,95 65,95
GPIO-PC0: P18.14 R4.2 U1.52 | length 48
  Top Layer w0.127: P18.14@20.58,66.06 21.925,67.405 21.925,69.35 23.302,70.727 23.446,70.727 23.492,70.681 24.108,70.681 24.545,71.117 24.545,71.231 24.788,71.475 27.367,71.475 27.396,71.504 40.555,71.504 41.154,70.905 41.154,69.879 40.754,69.479 40.754,60.662 40.218,60.125 40.218,59.318 U1.52@40.175,59.275 40.175,58.35 40.875,57.65 41.9,57.65 42.625,58.375 42.625,59.825 42.975,60.175 45.85,60.175 v1(46.175,59.85) ; v1(47.125,61.075) R4.2@47.125,61.9
  Bottom Layer w0.127: v1(46.175,59.85) 47.078,60.753 47.078,61.028 v1(47.125,61.075)
GPIO-PC1: P18.13 R2.2 U1.51 | length 46.6
  Top Layer w0.127: P18.13@20.58,68.6 22.961,70.981 23.551,70.981 23.597,70.935 24.003,70.935 24.291,71.222 24.291,71.337 24.682,71.729 27.262,71.729 27.291,71.758 40.66,71.758 41.408,71.01 41.408,69.774 41.008,69.374 41.008,60.556 40.675,60.223 U1.51@40.675,59.275 40.675,58.225 40.975,57.925 41.8,57.925 42.225,58.35 42.225,60.075 42.6,60.45 47.275,60.45 48.259,61.434 48.259,61.613 48.545,61.9 R2.2@48.725,61.9
GPIO-PC2: R8.2 U1.50 | length 4.8
  Top Layer w0.127: U1.50@41.175,59.275 41.175,60.3 41.925,61.05 43.625,61.05 43.925,61.35 R8.2@43.925,61.9
GPIO-PC3: R6.2 U1.49 | length 5.9
  Top Layer w0.127: U1.49@41.675,59.275 41.675,60.3 42.1,60.725 44.975,60.725 45.525,61.275 R6.2@45.525,61.9
GPIO-PC7: P18.5 U1.13 | length 24.7
  Top Layer w0.127: v1(28.376,50.202) 28.429,50.15 30.225,50.15 31.232,51.157 32.057,51.157 U1.13@32.1,51.2
  Bottom Layer w0.127: v1(28.376,50.202) 27.225,51.354 27.225,62.1 29.45,64.325 29.45,67.6 30.45,68.6 P18.5@30.74,68.6
GPIO-PD2: P18.19 U1.63 | length 28.3
  Top Layer w0.127: P18.19@12.96,68.6 14.24,67.32 14.24,65.139 16.558,62.821 21.065,62.821 24.719,59.167 26.335,59.167 27.368,60.2 32.814,60.2 32.939,60.325 34.5,60.325 34.675,60.15 U1.63@34.675,59.275
GPIO-PD3: P18.20 U1.64 | length 24.9
  Top Layer w0.127: P18.20@12.96,66.06 16.453,62.567 20.96,62.567 24.614,58.913 26.441,58.913 27.453,59.925 32.825,59.925 33.475,59.275 U1.64@34.175,59.275
GPIO-PD6: P18.15 U1.53 | length 36.2
  Top Layer w0.127: P18.15@18.04,68.6 19.865,70.425 v1(21.25,70.425) ; v1(25.05,70.35) 25.45,70.35 26.321,71.221 27.472,71.221 27.502,71.25 40.45,71.25 40.9,70.8 40.9,69.984 40.5,69.584 40.5,60.767 39.675,59.942 U1.53@39.675,59.275
  Bottom Layer w0.127: v1(21.25,70.425) 21.325,70.35 v1(25.05,70.35)
GPIO-PD7: P18.4 U1.10 | length 18.9
  Top Layer w0.127: v1(28.375,53.7) 30.3,53.7 31.257,52.743 32.057,52.743 U1.10@32.1,52.7
  Bottom Layer w0.127: v1(28.375,53.7) 27.875,54.2 27.875,60.655 P18.4@33.28,66.06
GPIO-PF4: P18.3 U1.5 | length 25.1
  Top Layer w0.127: v1(28.6,58.475) 27.08,58.475 25.85,57.245 25.85,55.375 26.3,54.925 30.5,54.925 30.775,55.2 U1.5@32.1,55.2
  Bottom Layer w0.127: v1(28.6,58.475) 28.6,59.65 34.4,65.45 34.4,68.136 34.146,68.39 33.49,68.39 P18.3@33.28,68.6
I2C1SCL: Q7.2 R42.1 TP9.1 U1.23 | length 47
  Top Layer w0.127: v1(36.9,50.35) 36.9,49.292 37.175,49.017 U1.23@37.175,47.625 ; v1(39.175,50.654) 41.615,50.654 42.934,49.334 43.684,49.334 45.521,47.498 45.521,41.839 52.28,35.08 52.28,31.533 52.788,31.025 52.788,27.479 53.236,27.031 53.236,23.484 54.941,21.78 55.691,21.78 56.45,21.02 Q7.2@58.85,21.02
  Bottom Layer w0.127: v1(36.9,50.35) 38.3,50.35 38.575,50.075 39.154,50.654 v1(39.175,50.654)